# Altium PCB 21V_Combined.PcbDoc
Units mm, origin at the board's own origin, x right, y up, seen from the top; angles counter-clockwise.
Board outline 152.4 x 101.6 mm, 2 copper layers (Top Layer, Bottom Layer); 54 components, 30 nets, 138 pads, 20 vias.
Unrouted connection lines stored in the file: 4.
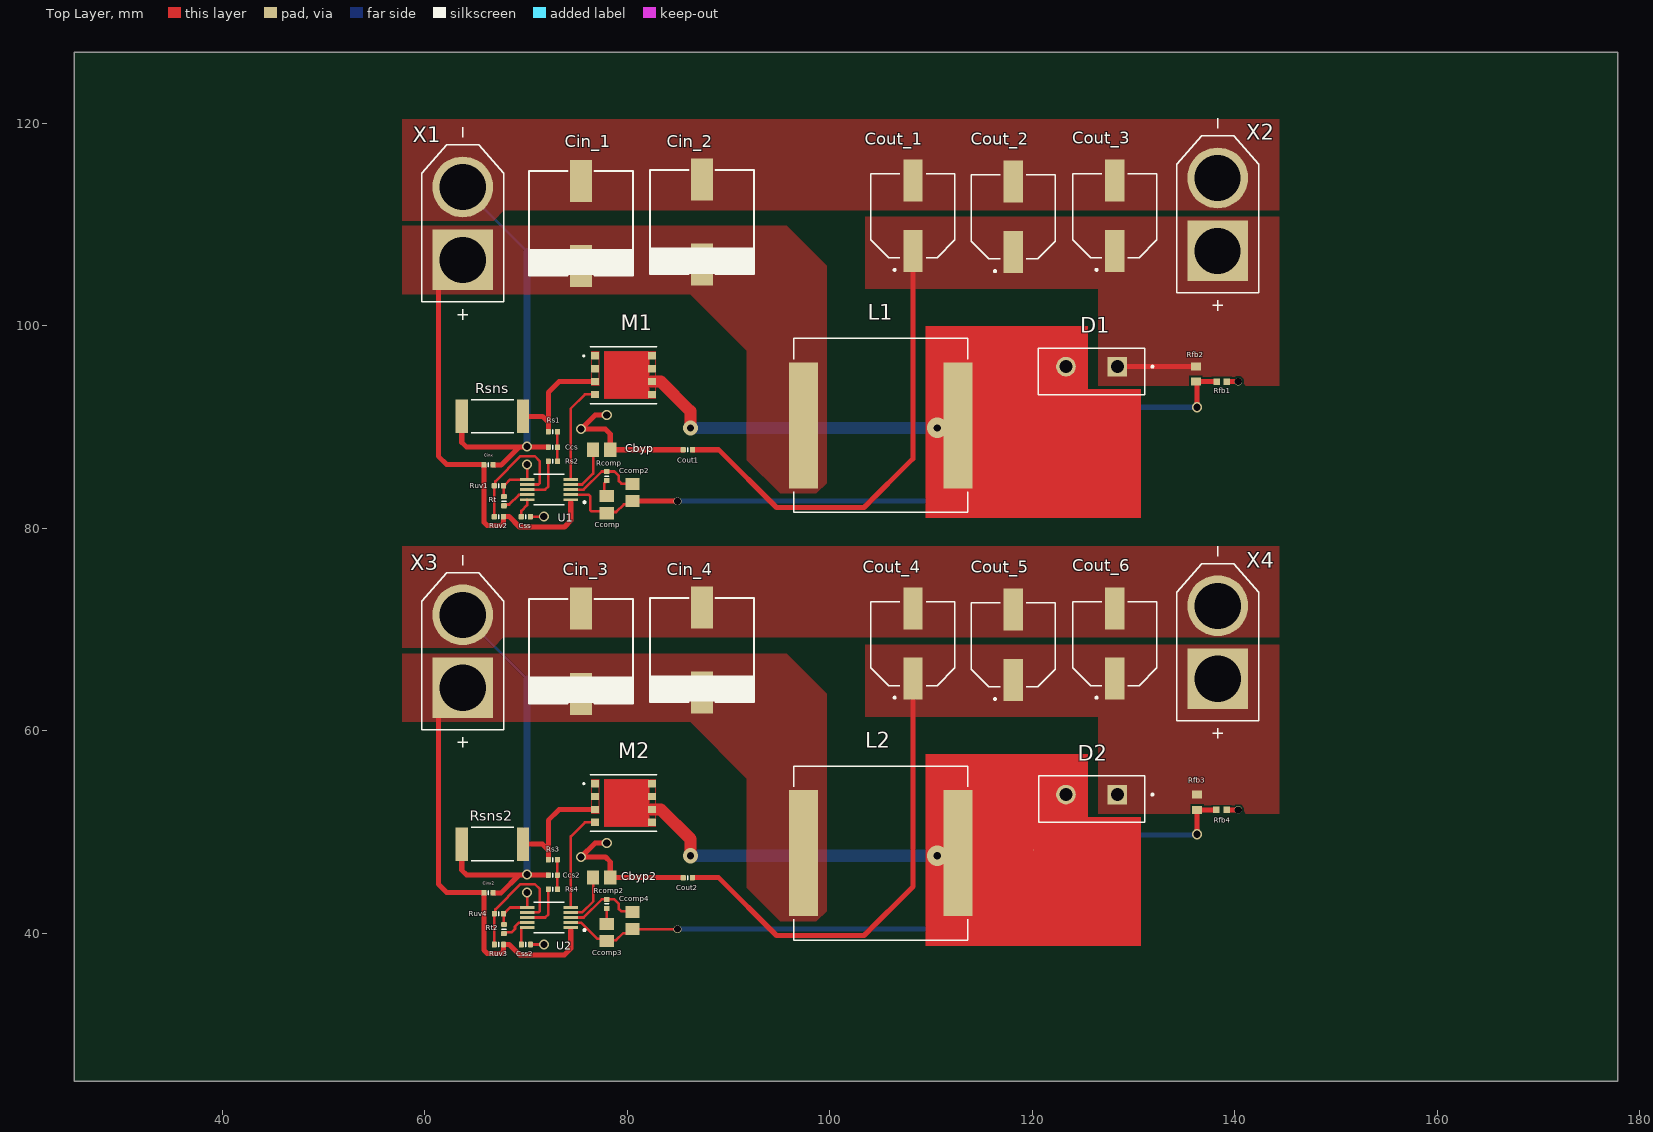
[diagram p0: Top Layer view]
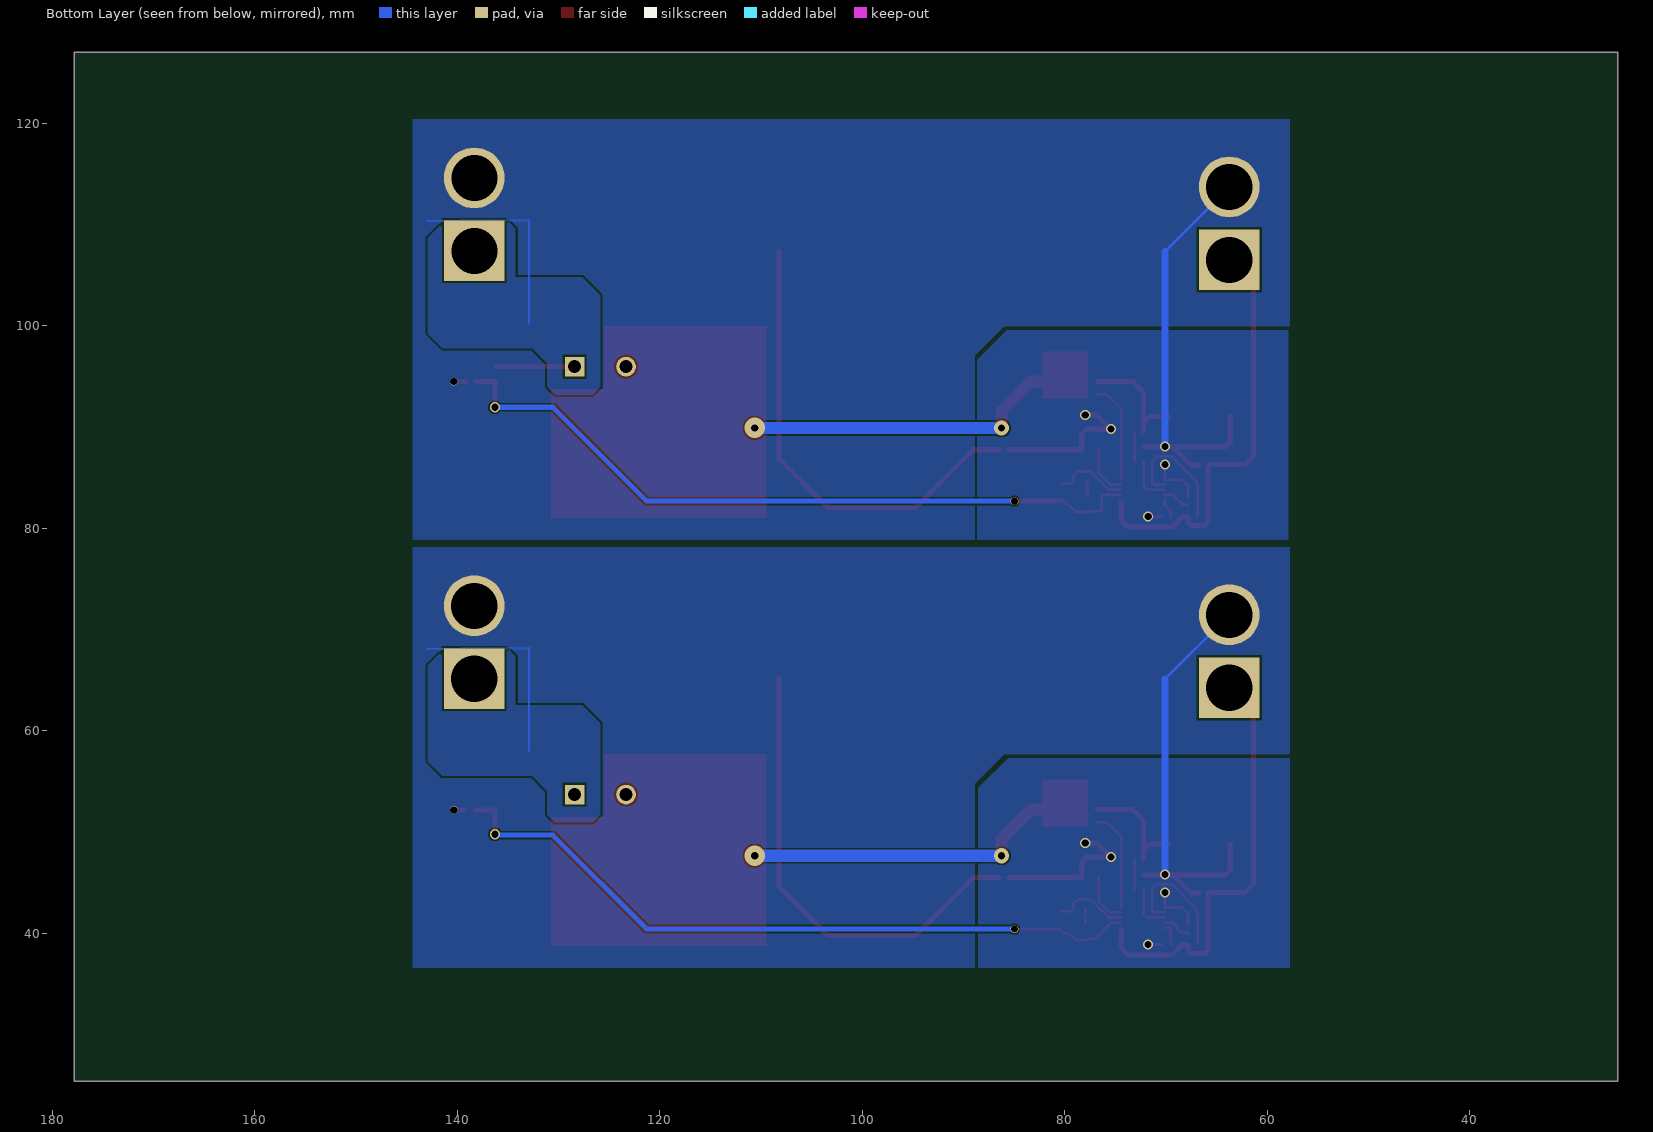
[diagram p1: Bottom Layer view, seen from below]
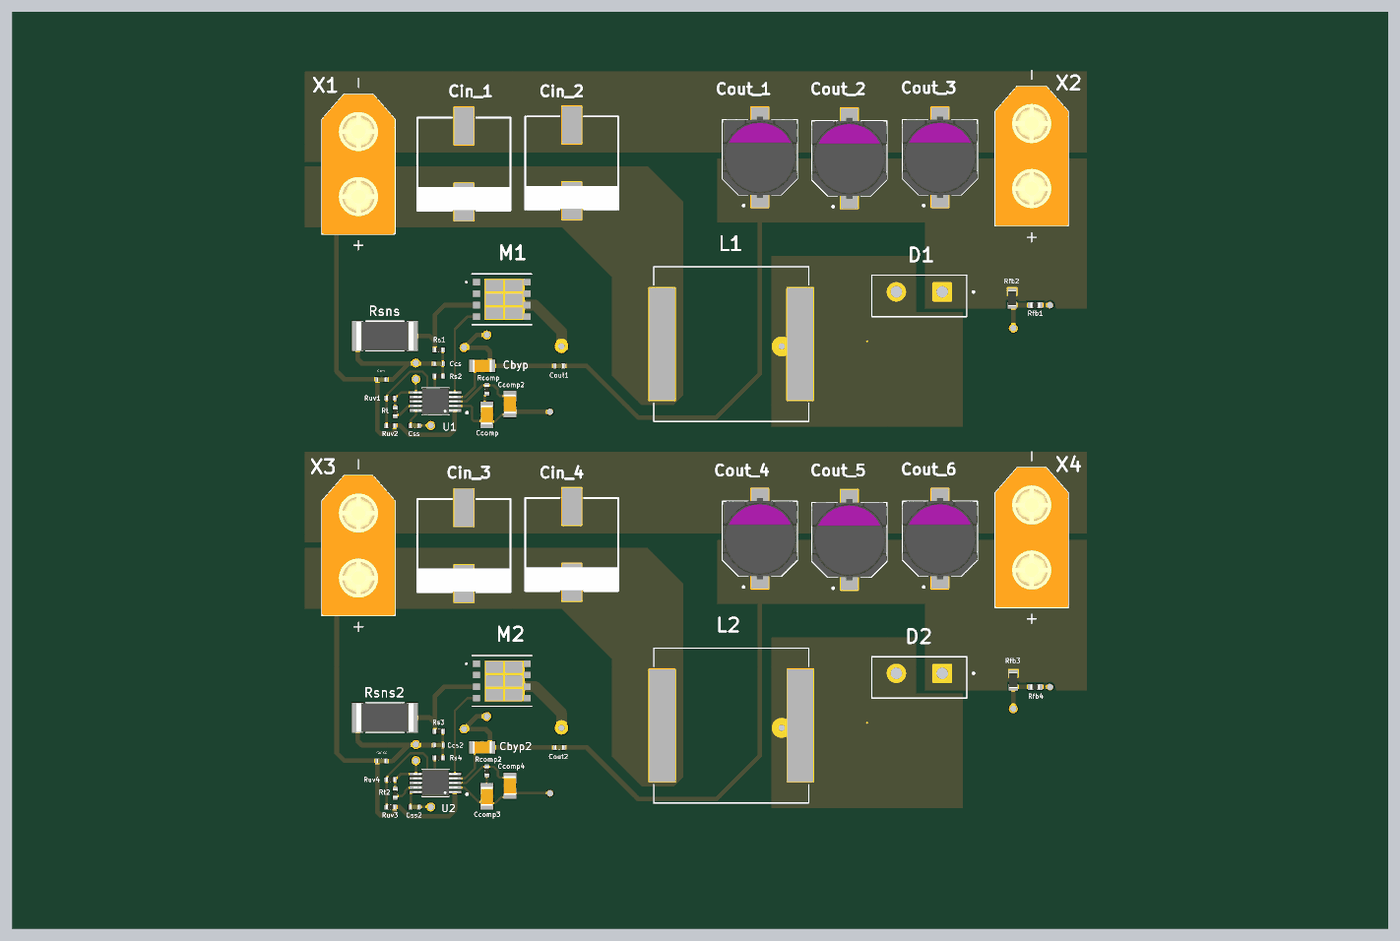
[diagram p2: 3D render of the assembled board from above, using the file's embedded part models]

## Layer stack, top to bottom
Top Solder: solder mask 0.0102, Solder Resist, Dk 3.5
Top Layer: signal copper 0.0356
Dielectric 1: dielectric 0.32, FR-4, Dk 4.8
Bottom Layer: signal copper 0.0356
Bottom Solder: solder mask 0.0102, Solder Resist, Dk 3.5

## Board outline
25.4,25.4 177.8,25.4 177.8,127 25.4,127

## Design rules (kind name [scope] priority, off if disabled: settings)
Clearance [All] p1: gap=0.2 ignorepadtopadclearanceinfootprint=FALSE
PolygonConnect [All] p1: connectstyle=Direct reliefconductorwidth=0.254 reliefentries=4 polygonreliefangle="90 Angle" airgapwidth=0.254
RoutingVias [All] p1: holewidth=0.711 width=1.27 viastyle="Through Hole" minholewidth=0.711 minwidth=1.27 maxholewidth=0.711 maxwidth=1.27
SolderMaskExpansion [All] p1: expansion=0.102 istentingtop=FALSE
SupplyNets "Schematic Supply Nets_6" [InNet('VIN_2')] p1: voltage=0.000
SupplyNets "Schematic Supply Nets_5" [InNet('VIN_1')] p2: voltage=0.000
SupplyNets "Schematic Supply Nets_4" [InNet('GND_2')] p3: voltage=0.000
SupplyNets "Schematic Supply Nets_3" [InNet('VOUT_2')] p4: voltage=0.000
SupplyNets "Schematic Supply Nets_2" [InNet('GND_1')] p5: voltage=0.000
SupplyNets "Schematic Supply Nets_1" [InNet('VOUT_1')] p6: voltage=0.000
Width [All] p1: maxlimit=2 minlimit=0.254 preferedwidth=0.254
30 further rules are at their usual default settings.

## Components (designator, comment, footprint, x,y, rotation, side; value= is the part's Value field where it differs from the comment)
Cbyp "Capacitor 10 uF +/- 10% 16 V 0805" CAPC2013X135X45NL10T25 77.47,87.757 r180 top value=100nF
Cbyp2 "Capacitor 10 uF +/- 10% 16 V 0805" CAPC2013X135X45NL10T25 77.472,45.505 r180 top value=100nF
Ccomp "Capacitor 10 uF +/- 10% 16 V 0805" CAPC2013X135X45NL10T25 77.978,82.335 r270 top value=47nf
Ccomp2 "Capacitor 10 uF +/- 10% 16 V 0805" CAPC2013X135X45NL10T25 80.518,83.527 r270 top value=3.9nf
Ccomp3 "Capacitor 10 uF +/- 10% 16 V 0805" CAPC2013X135X45NL10T25 77.98,40.083 r270 top value=47nf
Ccomp4 "Capacitor 10 uF +/- 10% 16 V 0805" CAPC2013X135X45NL10T25 80.52,41.275 r270 top value=3.9nf
Ccs "Capacitor 100nF +/-20% 10V 0402" CAPC0402(1005)60_L 72.653,88.011 r180 top value=1nF
Ccs2 "Capacitor 10µF +/-40% 6.3V 0402" CAPC0402(1005)60_L 72.655,45.759 r180 top value=8.2nF (schematic designator Css2)
Cin_1 "UUD1E471MNL1GS" UD(10X10) 75.438,110.109 r90 top value=470µF
Cin_2 "UUD1E471MNL1GS" UD(10X10) 87.376,110.236 r90 top value=470µF
Cin_3 "UUD1E471MNL1GS" UD(10X10) 75.44,67.857 r90 top value=470µF
Cin_4 "UUD1E471MNL1GS" UD(10X10) 87.378,67.984 r90 top value=470µF
Cinx "Capacitor 100nF +/-20% 10V 0402" CAPC0402(1005)60_L 66.295,86.257 r180 top value=100nF
Cinx2 "Capacitor 100nF +/-20% 10V 0402" CAPC0402(1005)60_L 66.297,44.005 r180 top value=100nF
Cout1 "Capacitor 470pF +/-20% 50V 0402" CAPC0402(1005)60_L 85.979,87.757 r180 top value=1uF
Cout2 "Capacitor 470pF +/-20% 50V 0402" CAPC0402(1005)60_L 85.981,45.505 r180 top value=1uF
Cout_1 "35SVPF39M" CAP_35SVPF39M 108.204,110.871 r90 top value=39µF
Cout_2 "35SVPF39M" CAP_35SVPF39M 118.11,110.744 r90 top value=39µF
Cout_3 "35SVPF39M" CAP_35SVPF39M 128.143,110.871 r90 top value=39µF
Cout_4 "35SVPF39M" CAP_35SVPF39M 108.206,68.619 r90 top value=39µF
Cout_5 "35SVPF39M" CAP_35SVPF39M 118.112,68.492 r90 top value=39µF
Cout_6 "35SVPF39M" CAP_35SVPF39M 128.145,68.619 r90 top value=39µF
Css "Capacitor 10µF +/-40% 6.3V 0402" CAPC0402(1005)60_L 69.986,81.153 r180 top value=8.2nF
Css2 "Capacitor 100nF +/-20% 10V 0402" CAPC0402(1005)60_L 69.988,38.901 r180 top value=1nF (schematic designator Ccs2)
D1 "510mV" TO508P1050X476X2020-2 125.857,95.504 r180 top
D2 "510mV" TO508P1050X476X2020-2 125.859,53.252 r180 top
L1 "IHLP6767GZER3R3M01" IND_IHLP6767GZER3R3M01 105.029,90.17 r0 top value=3.3µH
L2 "IHLP6767GZER3R3M01" IND_IHLP6767GZER3R3M01 105.031,47.918 r0 top value=3.3µH
M1 "CSD17303Q5" DQH8 79.629,95.123 r0 top
M2 "CSD17303Q5" DQH8 79.631,52.871 r0 top
Rcomp "1KR2J" RESC0402(1005)_L 77.978,85.159 r90 top value=1k
Rcomp2 "1KR2J" RESC0402(1005)_L 77.98,42.907 r90 top value=1k
Rfb1 "Resistor 0R +/- 5% 0402 100 mW" RESC1005X40X25ML05T05 138.692,94.488 r180 top value=1.15k
Rfb2 "Resistor 0R +/- 5% 0603 100 mW" RESC1608X55X25ML10T15 136.144,95.238 r90 top value=18k
Rfb3 "Resistor 0R +/- 5% 0402 100 mW" RESC1005X40X25ML05T05 138.676,52.197 r180 top value=1.15k
Rfb4 "Resistor 0R +/- 5% 0603 100 mW" RESC1608X55X25ML10T15 136.271,52.947 r270 top value=18k
Rs1 "1D6KR2J" RESC0402(1005)_L 72.653,89.535 r180 top value=100
Rs2 "1D6KR2J" RESC0402(1005)_L 72.653,86.614 r0 top value=3.48K
Rs3 "1D6KR2J" RESC0402(1005)_L 72.655,47.283 r180 top value=100
Rs4 "1D6KR2J" RESC0402(1005)_L 72.655,44.362 r0 top value=3.48K
Rsns "CSRN2512FK15L0" RESC6331X70N 66.684,91.059 r180 top value=15m
Rsns2 "CSRN2512FK15L0" RESC6331X70N 66.686,48.807 r180 top value=15m
Rt "1KR2J" RESC0402(1005)_L 67.827,82.677 r270 top value=42.2k
Rt2 "1KR2J" RESC0402(1005)_L 67.829,40.425 r270 top value=42.2k
Ruv1 "1D6KR2J" RESC0402(1005)_L 67.319,84.201 r180 top value=1.74K
Ruv2 "1D6KR2J" RESC0402(1005)_L 67.319,81.153 r0 top value=10K
Ruv3 "1D6KR2J" RESC0402(1005)_L 67.321,38.901 r0 top value=1.74K
Ruv4 "1D6KR2J" RESC0402(1005)_L 67.321,41.949 r180 top value=10K
U1 "LM5022MM/NOPB" SOP50P490X110-10N 72.272,83.82 r180 top
U2 "LM5022MM/NOPB" SOP50P490X110-10N 72.274,41.568 r180 top
X1 "XT60-M" AMASS_XT60-M 63.754,110.109 r90 top
X2 "XT60-M" AMASS_XT60-M 138.303,110.998 r90 top
X3 "XT60-M" AMASS_XT60-M 63.756,67.857 r90 top
X4 "XT60-M" AMASS_XT60-M 138.305,68.746 r90 top

## Footprints (in the part's own frame and the unit in brackets; to place one, negate y for a bottom-side part, rotate by r counter-clockwise, add the part's x,y. Pads: shape width x height; smd on the part's side, far side on the other; paste and mask are expansions set on the pad)
AMASS_XT60-M [mm]
  round 6 hole 4.55: N(3.6,0)
  rect 6x6 / inner round 6 / far side rect 6x6 hole 4.55: P(-3.6,0)
  silkscreen extent -9.5,-4.05 9.5,4.05, body extent -7.75,-4.05 7.75,4.05, height 16
CAP_35SVPF39M [mm]
  rect 4.15x1.9 smd: 1(-3.475,0) 2(3.475,0)
  silkscreen extent -5.45,-4.15 4.15,4.15, body extent -4.5,-4.15 4.5,4.15, height 6.9
CAPC0402(1005)60_L [mm] "Chip Capacitor, Body 1.0x0.5mm, Height 0.6mm, IPC High Density"
  rrect25% 0.5x0.55 smd: 1(-0.45,0) 2(0.45,0)
  silkscreen extent 0,-0.2 0,0.2, body extent -0.5,-0.25 0.5,0.25, height 0.6
CAPC2013X135X45NL10T25 [mm] "Chip Capacitor, 2-Leads, Body 2.10x1.35mm, IPC Medium Density"
  rect 1.2x1.4 smd: 1(-0.85,0) 2(0.85,0)
  body extent -1.05,-0.67 1.05,0.67, height 1.35
DQH8 [mil]
  rect 31x28 smd paste-14 mask-15.5: 1(-110,75) 2(-110,25) 3(-110,-25) 4(-110,-75) 5(110,-75) 6(110,-25) 7(110,25) 8(110,75)
  Top Layer region: -75,90 -75,75 -75,-75 -75,-90 100,-90 100,90
  silkscreen extent -157,-110 130,110
IND_IHLP6767GZER3R3M01 [mil]
  rect 113x490 smd: 1(-301,0) 2(301,0)
  silkscreen extent -338,-338 338,338
RESC0402(1005)_L [mm] "Chip Resistor, Body 1.0x0.5mm, IPC High Density"
  rrect25% 0.5x0.55 smd: 1(-0.45,0) 2(0.45,0)
  silkscreen extent 0,-0.2 0,0.2, body extent -0.5,-0.25 0.5,0.25, height 0.3
RESC1005X40X25ML05T05 [mm] "Chip Resistor, 2-Leads, Body 1.05x0.55mm, IPC Low Density"
  rect 0.65x0.65 smd: 1(-0.5,0) 2(0.5,0)
  body extent -0.53,-0.28 0.53,0.28, height 0.4
RESC1608X55X25ML10T15 [mm] "Chip Resistor, 2-Leads, Body 1.70x0.90mm, IPC Low Density"
  rect 0.8x1 smd: 1(-0.75,0) 2(0.75,0)
  body extent -0.85,-0.45 0.85,0.45, height 0.55
RESC6331X70N [mm]
  rect 1.21x3.32 smd: 1(-3.025,0) 2(3.025,0)
  silkscreen extent -2.1,-1.65 2.1,1.65, body extent -3.18,-1.58 3.18,1.58, height 0.7
SOP50P490X110-10N [mm]
  rrect25% 1.47x0.28 smd paste+0 mask+0.102: 1(-2.15,1) 2(-2.15,0.5) 3(-2.15,0) 4(-2.15,-0.5) 5(-2.15,-1) 6(2.15,-1) 7(2.15,-0.5) 8(2.15,0) 9(2.15,0.5) 10(2.15,1)
  silkscreen extent -3.6,-1.5 1.5,1.5, body extent -2.45,-1.5 2.45,1.5, height 1.1
TO508P1050X476X2020-2 [mm]
  rect 1.94x1.94 / inner round 1.94 / far side rect 1.94x1.94 hole 1.29: 1(-2.54,-0.453)
  round 1.94 hole 1.29: 3(2.54,-0.453)
  silkscreen extent -6.1,-2.29 5.25,2.29
UD(10X10) [mm]
  rect 4.15x2.15 smd: 1(-4.2,0) 2(4.2,0)
  silkscreen extent -5.15,-5.15 5.15,5.15

## Part data
Cbyp Cbyp2 Ccomp Ccomp2 Ccomp3 Ccomp4: library part CMP-001-00015-6, "Chip Capacitor, 10 uF, +/- 10%, 16 V, 0805 (2012 Metric)", Capacitor Type=Ceramic, Case/Package=0805, Max Operating Temperature=85°C, Min Operating Temperature=-55°C, Tolerance=10%, Voltage Rating=16V, Mounting Technology=SM, Pins=2, RoHS Compliant=True
Ccs Cinx Cinx2 Css2: library part CMP-001-00061-3, "Chip Capacitor, 100nF +/-20%, 10V, 0402, Thickness 0.6 mm", Case/Package=0402, Max Operating Temperature=85°C, Min Operating Temperature=-55°C, Tolerance=20%, Voltage Rating=10V, Mounting Technology=SMT, Pins=2
Ccs2 Css: library part CMP-001-00074-3, "Chip Capacitor, 10µF +/-40%, 6.3V, 0402, Thickness 0.6 mm", Case/Package=0402, Max Operating Temperature=85°C, Min Operating Temperature=-55°C, Tolerance=10%, Voltage Rating=6.3V, Mounting Technology=SMT, Pins=2
Cin_1 Cin_2 Cin_3 Cin_4: library part CMP-001-00083-1, "470ÂµF 25V Aluminum Electrolytic Capacitors Radial, Can - SMD 5000 Hrs @ 105Â°C", Case/Package="Radial Nichicon", Arrow_Electronics-Purchase-URL=https://snapeda.com/shop?store=Arrow+Electronics&id=1197381, Arrow_Europe-Purchase-URL=https://snapeda.com/shop?store=Arrow+Europe&id=1197381, Availability=Good, Component Type=Standard, Design Item ID=UUD1E471MNL1GS, DigiKey-Purchase-URL=https://snapeda.com/shop?store=DigiKey&id=1197381, MF=Nichicon, Mouser-Purchase-URL=https://snapeda.com/shop?store=Mouser&id=1197381, MP=UUD1E471MNL1GS, Pins=2, Price=None, SnapEDA_Link=https://www.snapeda.com/parts/UUD1E471MNL1GS/Nichicon/view-part/1197381/?ref=snap, Source=UUD1E471MNL1GS.SchLib
Cout1 Cout2: library part CMP-001-00068-4, "Chip Capacitor, 470pF +/-20%, 50V, 0402, Thickness 0.6 mm", Case/Package=0402, Max Operating Temperature=85°C, Min Operating Temperature=-55°C, Tolerance=20%, Voltage Rating=50V, Mounting Technology=SMT, Pins=2
Cout_1 Cout_2 Cout_3 Cout_4 Cout_5 Cout_6: library part CMP-001-00084-1, "Capacitor, Aluminum Organic Polymer, 35VDC,39uF,30mohm,8x7mm,T&R", Case/Package="RADIAL-2 Panasonic", Component Type=Standard, Design Item ID=35SVPF39M, MF=Panasonic, MP=35SVPF39M, Pins=2, SnapEDA_Link=https://www.snapeda.com/parts/35SVPF39M/Panasonic/view-part/?ref=snap, Source=35SVPF39M.SchLib
D1 D2: library part CMP-004-00031-1, "Rectifier Diode Switching 200V 8A 35ns 2-Pin(2+Tab) TO-220AC Tube", Case/Package=None, Check_prices=https://www.snapeda.com/parts/MUR820G/Onsemi/view-part/?ref=eda, Component Type=Standard, Design Item ID=MUR820G, MF=onsemi, MP=MUR820G, Pins=2, SnapEDA_Link=https://www.snapeda.com/parts/MUR820G/Onsemi/view-part/?ref=snap, Source=MUR820G.SchLib
L1 L2: library part CMP-006-00024-1, Case/Package=None, Availability=Unavailable, Component Type=Standard, Design Item ID=IHLP6767GZER3R3M01, MP=IHLP6767GZER3R3M01, Pins=2, Price=None, Source=IHLP6767GZER3R3M01.SchLib
M1 M2: library part CMP-031-000000-1, "30-V, N channel NexFETâ„¢ power MOSFET, single SON 5 mm x 6 mm, 2.6 mOhm 8-VSON-CLIP -55 to 150", Manufacturer_Name="Texas Instruments", Copyright="Copyright (C) 2025 Ultra Librarian. All rights reserved.", Design Item ID=CSD17303Q5, Manufacturer_Part_Number=CSD17303Q5, RefDes=RefDes, Source=CSD17303Q5.SchLib, Type=Type
Rcomp Rcomp2 Rt Rt2: library part CMP-009-00075-2, "1K 0.063W 5% 0402 (1005 Metric)  SMD", Case/Package=0402, Power=63mW, Tolerance=5%, Mounting Technology=SMT, Pins=2
Rfb1 Rfb3: library part CMP-009-00005-5, "Chip Resistor, 0 Ohm, 0.1 W, -55 to 155 degC, 0402 (1005 Metric)", Case/Package=0402, Max Operating Temperature=155°C, Min Operating Temperature=-55°C, Power=100mW, Tolerance=5%, Voltage Rating=50V, Mounting Technology=SM, Pins=2, RoHS Compliant=True
Rfb2 Rfb4: library part CMP-009-00006-5, "Chip Resistor, 0 Ohm, 0.1 W, -55 to 155 degC, 0603 (1608 Metric)", Case/Package=0603, Max Operating Temperature=155°C, Min Operating Temperature=-55°C, Power=100mW, Tolerance=5%, Voltage Rating=50V, Mounting Technology=SM, Pins=2, RoHS Compliant=True
Rs1 Rs2 Rs3 Rs4 Ruv1 Ruv2 Ruv3 Ruv4: library part CMP-009-00073-2, "1K6 0.063W 5% 0402 (1005 Metric)  SMD", Case/Package=0402, Power=63mW, Tolerance=5%, Mounting Technology=SMT, Pins=2
Rsns Rsns2: library part CMP-009-00177-1, "15 mOhms Â±1% 2W Chip Resistor 2512 (6432 Metric) Automotive AEC-Q200, Current Sense Thick Film", Case/Package="6331 Stackpole", Check_prices=https://www.snapeda.com/parts/CSRN2512FK15L0/Stackpole+Electronics/view-part/?ref=eda, Component Type=Standard, Design Item ID=CSRN2512FK15L0, MF="Stackpole Electronics Inc", MP=CSRN2512FK15L0, Pins=2, SnapEDA_Link=https://www.snapeda.com/parts/CSRN2512FK15L0/Stackpole+Electronics/view-part/?ref=snap, Source=CSRN2512FK15L0.SchLib
U1 U2: library part CMP-027-000000-1, "6-60V Wide Vin, current mode boost, SEPIC and Flyback controller", Package="VSSOP-10 Texas Instruments", Check_prices=https://www.snapeda.com/parts/LM5022MM/NOPB/Texas+Instruments/view-part/?ref=eda, Component Type=Standard, Design Item ID=LM5022MM/NOPB, MF="Texas Instruments", MP=LM5022MM/NOPB, Pin Count=10, SnapEDA_Link=https://www.snapeda.com/parts/LM5022MM/NOPB/Texas+Instruments/view-part/?ref=snap, Source=LM5022MM_NOPB.SchLib
X1 X2 X3 X4: library part CMP-046-000000-1, "Plug; DC supply; XT60; male; PIN: 2; for cable; soldered; 30A; 500V", Package=Package, Check_prices=https://www.snapeda.com/parts/XT60-M/AMASS/view-part/?ref=eda, Component Type=Standard, Design Item ID=XT60-M, MF=AMASS, MP=XT60-M, Pin Count=2, SnapEDA_Link=https://www.snapeda.com/parts/XT60-M/AMASS/view-part/?ref=snap, Source=XT60-M.SchLib

## Free pads (board coordinates)
  round 0.025 smd: 1(120.078,90.487) 1(120.08,48.235)

## Via types
v1: diameter 1, hole 0.711, Top Layer to Bottom Layer, 12 vias
v2: diameter 0.75, hole 0.711, Top Layer to Bottom Layer, 4 vias
v3: diameter 1.5, hole 0.711, Top Layer to Bottom Layer, 2 vias
v4: diameter 2, hole 0.711, Top Layer to Bottom Layer, 2 vias

## Nets (pads, with @x,y where several pads share a name; then routed paths per layer and width w, separated by ;. In a path a pad name is that pad's centre, name@x,y a point inside that pad or via, vN(x,y) a via of type N, cw(c..) or ccw(c..) an arc to the next point about the centre after c; other vN are vias at no path point)
GND_1: Cbyp.1 Ccs.2 Cin_1.2 Cin_2.2 Cinx.1 Cout1.2 Cout_1.2 Cout_2.2 Cout_3.2 Css.1 Rfb1.1 Rsns.2 Rt.1 Ruv1.1 U1.6 X1.N X2.N | length 65.5
  Top Layer w0.254: Rt.1 67.798,83.156 67.798,84.255 67.892,84.349 67.975,84.349 68.433,84.807 70.109,84.807 70.113,84.811 v1(70.113,86.295) ; Css.1 v1(71.764,81.153)
  Top Layer w0.5: Rsns.2 63.659,88.496 64.144,88.011 69.301,88.011 ; Cinx.1 67.547,86.257 69.301,88.011 ; v1@70.113,88.011 Ccs.2 ; v1(70.113,88.078) 70.065,88.03 69.32,88.03 69.301,88.011 ; v1(77.978,91.186) 76.835,91.186 v1(75.438,89.789) 77.851,89.789 78.32,89.32 Cbyp.1 Cout1.2 ; Rfb1.1 v2(140.335,94.488)
  Bottom Layer w0.254: X1.N 70.113,107.35
  Bottom Layer w0.7: v1(70.113,88.078) 70.113,107.35
GND_2: Cbyp2.1 Ccs2.2 Cin_3.2 Cin_4.2 Cinx2.1 Cout2.2 Cout_4.2 Cout_5.2 Cout_6.2 Css2.1 Rfb3.1 Rsns2.2 Rt2.1 Ruv4.1 U2.6 X3.N X4.N | length 65.5
  Top Layer w0.254: Rt2.1 67.8,40.904 67.8,42.003 67.894,42.097 67.977,42.097 68.435,42.555 70.111,42.555 70.115,42.559 v1(70.115,44.043) ; Css2.1 v1(71.766,38.901) ; Rfb3.1@139.232,52.253 Rfb3.1@139.288,52.197
  Top Layer w0.5: Rsns2.2 63.661,46.244 64.146,45.759 69.302,45.759 ; Cinx2.1 67.548,44.005 69.302,45.759 ; v1@70.115,45.759 Ccs2.2 ; v1(70.115,45.826) 70.067,45.778 69.322,45.778 69.302,45.759 ; v1(77.98,48.934) 76.837,48.934 v1(75.44,47.537) 77.853,47.537 78.322,47.068 Cbyp2.1 Cout2.2 ; Rfb3.1@139.288,52.197 v2(140.335,52.197)
  Bottom Layer w0.254: X3.N 70.115,65.098
  Bottom Layer w0.7: v1(70.115,45.826) 70.115,65.098
NetCbyp2_2: Cbyp2.2 U2.4 | length 5
  Top Layer w0.254: U2.4 75.552,42.068 76.643,43.159 76.643,45.484 Cbyp2.2
NetCbyp_2: Cbyp.2 U1.4 | length 5
  Top Layer w0.254: U1.4 75.55,84.32 76.641,85.411 76.641,87.736 Cbyp.2
NetCcomp2_1: Ccomp2.1 Rcomp.2 U1.3 | length 7.4
  Top Layer w0.254: U1.3 75.692,83.82 77.481,85.609 Rcomp.2 78.729,85.609 79.179,85.159 79.179,84.651 79.414,84.416 Ccomp2.1@80.273,84.416
NetCcomp2_2: Ccomp2.2 Ccomp.2 Rfb1.2 Rfb2.1 U1.2 | length 72.1
  Top Layer w0.254: U1.2 76.187,83.32 76.336,83.171 76.336,81.81 76.485,81.661 Ccomp.2@77.606,81.661 ; Ccomp.2@77.61,81.577 77.64,81.607 78.91,81.607 79.673,82.37 79.945,82.37 80.146,82.571 Ccomp2.2@80.146,82.843 ; Rfb2.1 Rfb2.1@136.271,94.361
  Top Layer w0.5: Ccomp2.2 v2(84.963,82.677) ; Rfb2.1 Rfb1.2 ; v1(136.271,91.948) Rfb2.1@136.271,94.361
  Bottom Layer w0.5: v2(84.963,82.677) 121.285,82.677 130.556,91.948 v1(136.271,91.948)
NetCcomp3_1: Ccomp3.1 Rcomp2.1 | length 1.4
  Top Layer w0.254: Ccomp3.1 Rcomp2.1@77.98,42.369
NetCcomp3_2: Ccomp3.2 Ccomp4.2 Rfb3.2 Rfb4.2 U2.2 | length 71.3
  Top Layer w0.254: U2.2 74.437,41.055 75.445,41.055 77.048,39.452 77.761,39.452 Ccomp3.2 78.072,39.325 78.912,39.325 79.6,40.014 80.108,40.014 Ccomp4.2 v2(84.965,40.425)
  Top Layer w0.5: v1(136.271,49.784) Rfb4.2 Rfb3.2
  Bottom Layer w0.5: v2(84.965,40.425) 121.287,40.425 130.558,49.696 v1@136.273,49.696
NetCcomp4_1: Ccomp4.1 Rcomp2.2 U2.3 | length 7.4
  Top Layer w0.254: U2.3 75.694,41.568 77.483,43.357 Rcomp2.2 78.731,43.357 79.181,42.907 79.181,42.399 79.416,42.164 Ccomp4.1@80.275,42.164
NetCcomp_1: Ccomp.1 Rcomp.1 | length 1.7
  Top Layer w0.254: Ccomp.1 77.724,83.439 77.724,84.437 77.83,84.543 77.83,84.586 77.953,84.709 Rcomp.1
NetCcs2_1: Ccs2.1 Rs3.1 Rs4.2 | length 2.9
  Top Layer w0.254: Rs4.2@73.105,44.387 Rs3.1
NetCcs_1: Ccs.1 Rs1.1 Rs2.2 | length 2.9
  Top Layer w0.254: Rs2.2 Ccs.1 Rs1.1
NetCss2_2: Css2.2 U2.10 | length 2.2
  Top Layer w0.254: Css2.2 69.538,40.555 69.551,40.568 U2.10
NetCss_2: Css.2 U1.10 | length 1.9
  Top Layer w0.254: Css.2 69.536,81.719 70.113,82.296 70.113,82.811 U1.10
NetD1_3: D1.3 L1.2 M1.5 M1.6 M1.7 M1.8 pad.1@120.078,90.487 | length 31.1
  Top Layer w1.2: M1.6 83.312,94.488 86.233,91.567 v3(86.233,89.916)
  Bottom Layer w1.2: v3(86.233,89.916) v4(110.617,89.916)
NetD2_3: D2.3 L2.2 M2.5 M2.6 M2.7 M2.8 pad.1@120.08,48.235 | length 31.1
  Top Layer w1.2: M2.6 83.314,52.236 86.235,49.315 v3(86.235,47.664)
  Bottom Layer w1.2: v3(86.235,47.664) v4(110.619,47.664)
NetM1_1: M1.1 M1.2 M1.3 Rs1.2 Rsns.1 | length 11.7
  Top Layer w0.5: Rsns.1 71.637,91.059 72.203,90.493 ; Rs1.2 72.203,90.493 ; M1.3 73.279,94.488 72.203,93.412 72.203,90.493
NetM1_4: M1.4 U1.5 | length 10
  Top Layer w0.254: U1.5 74.422,91.821 75.819,93.218 M1.4
NetM2_1: M2.1 M2.2 M2.3 Rs3.2 Rsns2.1 | length 11.7
  Top Layer w0.5: Rsns2.1 71.639,48.807 72.205,48.241 ; Rs3.2 72.205,48.241 ; M2.3 73.281,52.236 72.205,51.16 72.205,48.241
NetM2_4: M2.4 U2.5 | length 10
  Top Layer w0.254: U2.5 74.424,49.569 75.821,50.966 M2.4
NetRs2_1: Rs2.1 U1.8 | length 4.7
  Top Layer w0.254: U1.8 71.891,83.82 72.203,84.132 Rs2.1
NetRs4_1: Rs4.1 U2.8 | length 4.7
  Top Layer w0.254: U2.8 71.893,41.568 72.205,41.88 Rs4.1
NetRt2_2: Rt2.2 U2.9 | length 2.9
  Top Layer w0.254: Rt2.2 67.952,40.098 68.562,40.098 68.918,40.454 68.918,40.679 69.274,41.035 69.416,41.035 69.436,41.055 70.111,41.055 U2.9
NetRt_2: Rt.2 U1.9 | length 2.7
  Top Layer w0.254: Rt.2 67.95,82.35 68.335,82.35 69.292,83.307 70.109,83.307 U1.9
NetRuv1_2: Ruv1.2 Ruv2.1 U1.7 | length 12.6
  Top Layer w0.254: Ruv2.1@66.924,81.153 66.869,81.208 Ruv1.2 66.968,84.3 66.968,84.621 69.469,87.122 70.866,87.122 71.374,86.614 71.374,84.469 71.225,84.32 U1.7
NetRuv3_2: Ruv3.1 Ruv4.2 U2.7 | length 12.6
  Top Layer w0.254: Ruv3.1@66.925,38.901 66.871,38.956 Ruv4.2 66.97,42.048 66.97,42.369 69.471,44.87 70.868,44.87 71.376,44.362 71.376,42.217 71.227,42.068 U2.7
VIN_1: Cin_1.1 Cin_2.1 Cinx.2 L1.1 Ruv2.2 U1.1 X1.P | length 42.9
  Top Layer w0.5: X1.P 61.341,104.096 61.341,87.122 62.165,86.298 65.804,86.298 Cinx.2 65.845,80.594 66.176,80.264 67.551,80.264 67.769,80.482 Ruv2.2 68.335,81.153 69.351,80.137 73.796,80.137 74.422,80.763 74.422,82.55
VIN_2: Cin_3.1 Cin_4.1 Cinx2.2 L2.1 Ruv3.2 U2.1 X3.P | length 42.9
  Top Layer w0.5: X3.P 61.343,61.844 61.343,44.87 62.166,44.046 65.806,44.046 Cinx2.2 65.847,38.342 66.178,38.012 67.553,38.012 67.771,38.23 Ruv3.2 68.337,38.901 69.353,37.885 73.798,37.885 74.424,38.511 74.424,40.298
VOUT_1: Cout1.1 Cout_1.1 Cout_2.1 Cout_3.1 D1.1 Rfb2.2 X2.P | length 54.4
  Top Layer w0.254: Rfb2.2@136.113,95.957 Rfb2.2
  Top Layer w0.5: Cout1.1 89.027,87.757 94.742,82.042 103.378,82.042 108.204,86.868 Cout_1.1 ; D1.1 Rfb2.2@136.113,95.957
VOUT_2: Cout2.1 Cout_4.1 Cout_5.1 Cout_6.1 D2.1 Rfb4.1 X4.P | length 46.7
  Top Layer w0.5: Cout2.1 89.029,45.505 94.744,39.79 103.38,39.79 108.206,44.616 Cout_4.1

## Polygon pours and split planes (outlines as drawn)
VOUT_2 on Top Layer "VOUT_2_L01_P020" (solid, pour order 20): 144.401,68.492 103.507,68.492 103.507,61.38 126.494,61.38 126.494,51.833 144.401,51.833
GND_2 on Top Layer "GND_2_L01_P018" (solid, pour order 18): 57.787,78.235 144.401,78.235 144.401,69.218 67.771,69.218 66.755,68.202 57.787,68.202
no net on Top Layer "NONET_L01_P022" (solid, pour order 22): 76.456,55.157 76.456,51.855 77.218,51.855 77.218,55.157
no net on Top Layer "NONET_L01_P021" (solid, pour order 21): 77.726,55.157 77.726,50.585 82.806,50.585 82.806,55.157
VIN_2 on Top Layer "VIN_2_L01_P019" (solid, pour order 19): 98.681,41.187 99.697,42.203 99.697,63.666 95.76,67.603 57.787,67.603 57.787,60.872 86.235,60.872 91.823,55.284 91.823,44.489 95.125,41.187
no net on Top Layer "NONET_L01_P004" (solid, pour order 4): 76.454,97.409 76.454,94.107 77.216,94.107 77.216,97.409
no net on Top Layer "NONET_L01_P003" (solid, pour order 3): 77.724,97.409 77.724,92.837 82.804,92.837 82.804,97.409
VOUT_1 on Top Layer "VOUT_1_L01_P002" (solid, pour order 2): 144.399,110.744 103.505,110.744 103.505,103.632 126.492,103.632 126.492,94.085 144.399,94.085
VIN_1 on Top Layer "VIN_1_L01_P001" (solid, pour order 1): 98.679,83.439 99.695,84.455 99.695,105.918 95.758,109.855 57.785,109.855 57.785,103.124 86.233,103.124 91.821,97.536 91.821,86.741 95.123,83.439
GND_1 on Top Layer "GND_1_L01_P000" (solid, pour order 0): 57.785,120.396 144.399,120.396 144.399,111.379 67.818,111.379 66.802,110.363 57.785,110.363
GND_1 on Bottom Layer "GND_1_L02_P007" (solid, pour order 7): 57.912,99.568 85.725,99.568 88.646,96.647 88.646,78.867 57.912,78.867
GND_2 on Bottom Layer "GND_2_L02_P026" (solid, pour order 26): 57.787,78.144 144.401,78.144 144.401,36.615 88.902,36.615 88.902,54.776 85.981,57.697 57.787,57.697
GND_2 on Bottom Layer "GND_2_L02_P025" (solid, pour order 25): 57.787,57.316 85.6,57.316 88.521,54.395 88.521,36.615 57.787,36.615
no net on Bottom Layer "NONET_L02_P024" (solid, pour order 24): 131.109,54.141 131.198,54.141 132.595,55.547 141.489,55.547 142.877,56.935 142.877,66.46 140.972,68.365 135.257,68.365 135.257,68.348 134.241,67.346 134.241,62.523 127.637,62.523 125.859,60.745 125.859,51.733 126.624,50.957 130.177,50.957 130.347,50.966 131.109,51.728
no net on Bottom Layer "NONET_L02_P023" (solid, pour order 23): 143.004,68.111 132.971,68.111 132.971,57.951 132.844,58.078 132.844,68.238
GND_1 on Bottom Layer "GND_1_L02_P008" (solid, pour order 8): 57.785,120.396 144.399,120.396 144.399,78.867 88.9,78.867 88.9,97.028 85.979,99.949 57.785,99.949
no net on Bottom Layer "NONET_L02_P006" (solid, pour order 6): 131.107,96.393 131.197,96.393 132.594,97.799 141.487,97.799 142.875,99.187 142.875,108.712 140.97,110.617 135.255,110.617 135.255,110.6 134.239,109.598 134.239,104.775 127.635,104.775 125.857,102.997 125.857,93.985 126.623,93.209 130.175,93.209 130.345,93.218 131.107,93.98
no net on Bottom Layer "NONET_L02_P005" (solid, pour order 5): 143.002,110.363 132.969,110.363 132.969,100.203 132.842,100.33 132.842,110.49

## Other copper
Top Layer:
  region net NetD1_3: 125.476,93.726 130.683,93.726 130.683,81.026 109.474,81.026 109.474,99.949 125.476,99.949
  region net NetD2_3: 125.478,51.474 130.685,51.474 130.685,38.774 109.476,38.774 109.476,57.697 125.478,57.697